# EAGLE board mega pinout (4) (EAGLE 9.3.0)
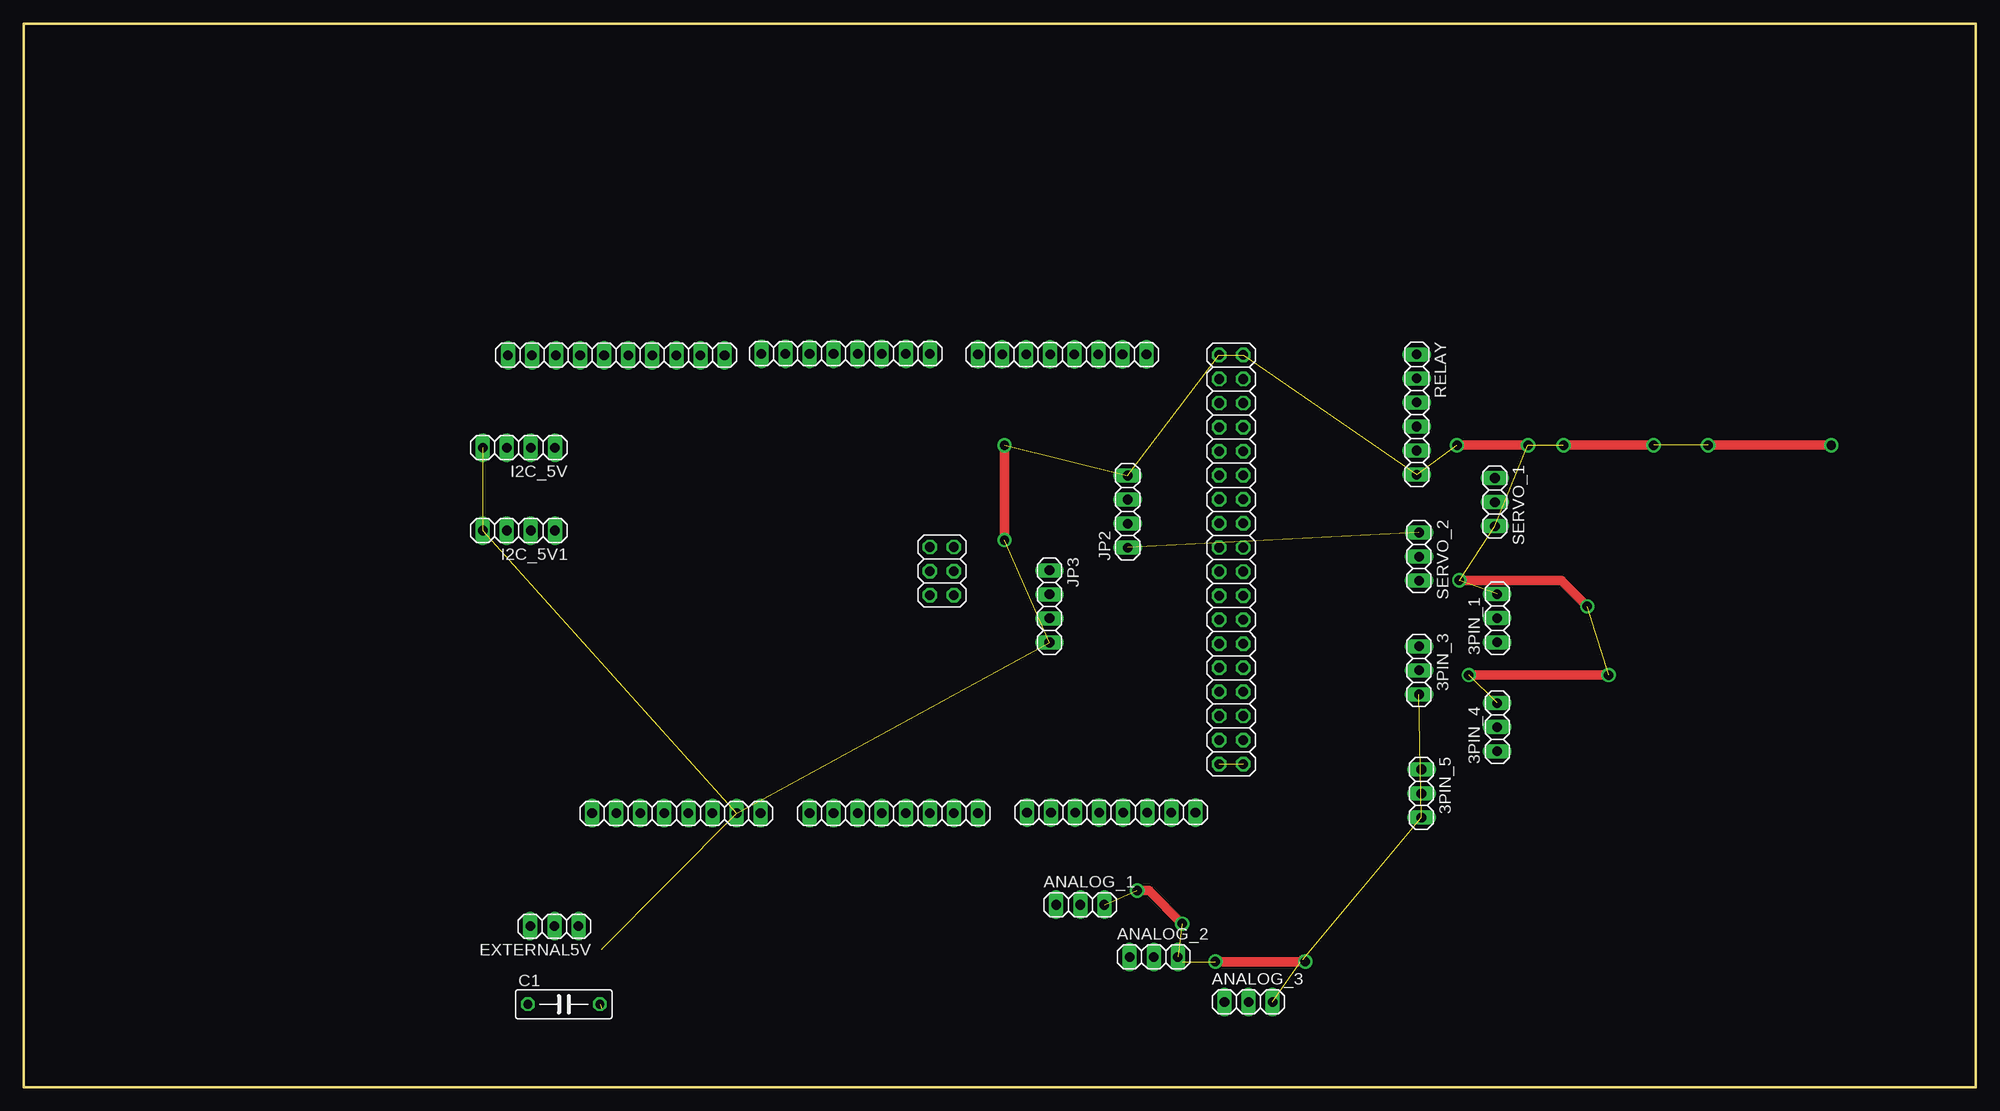
[diagram p0: board, top side]
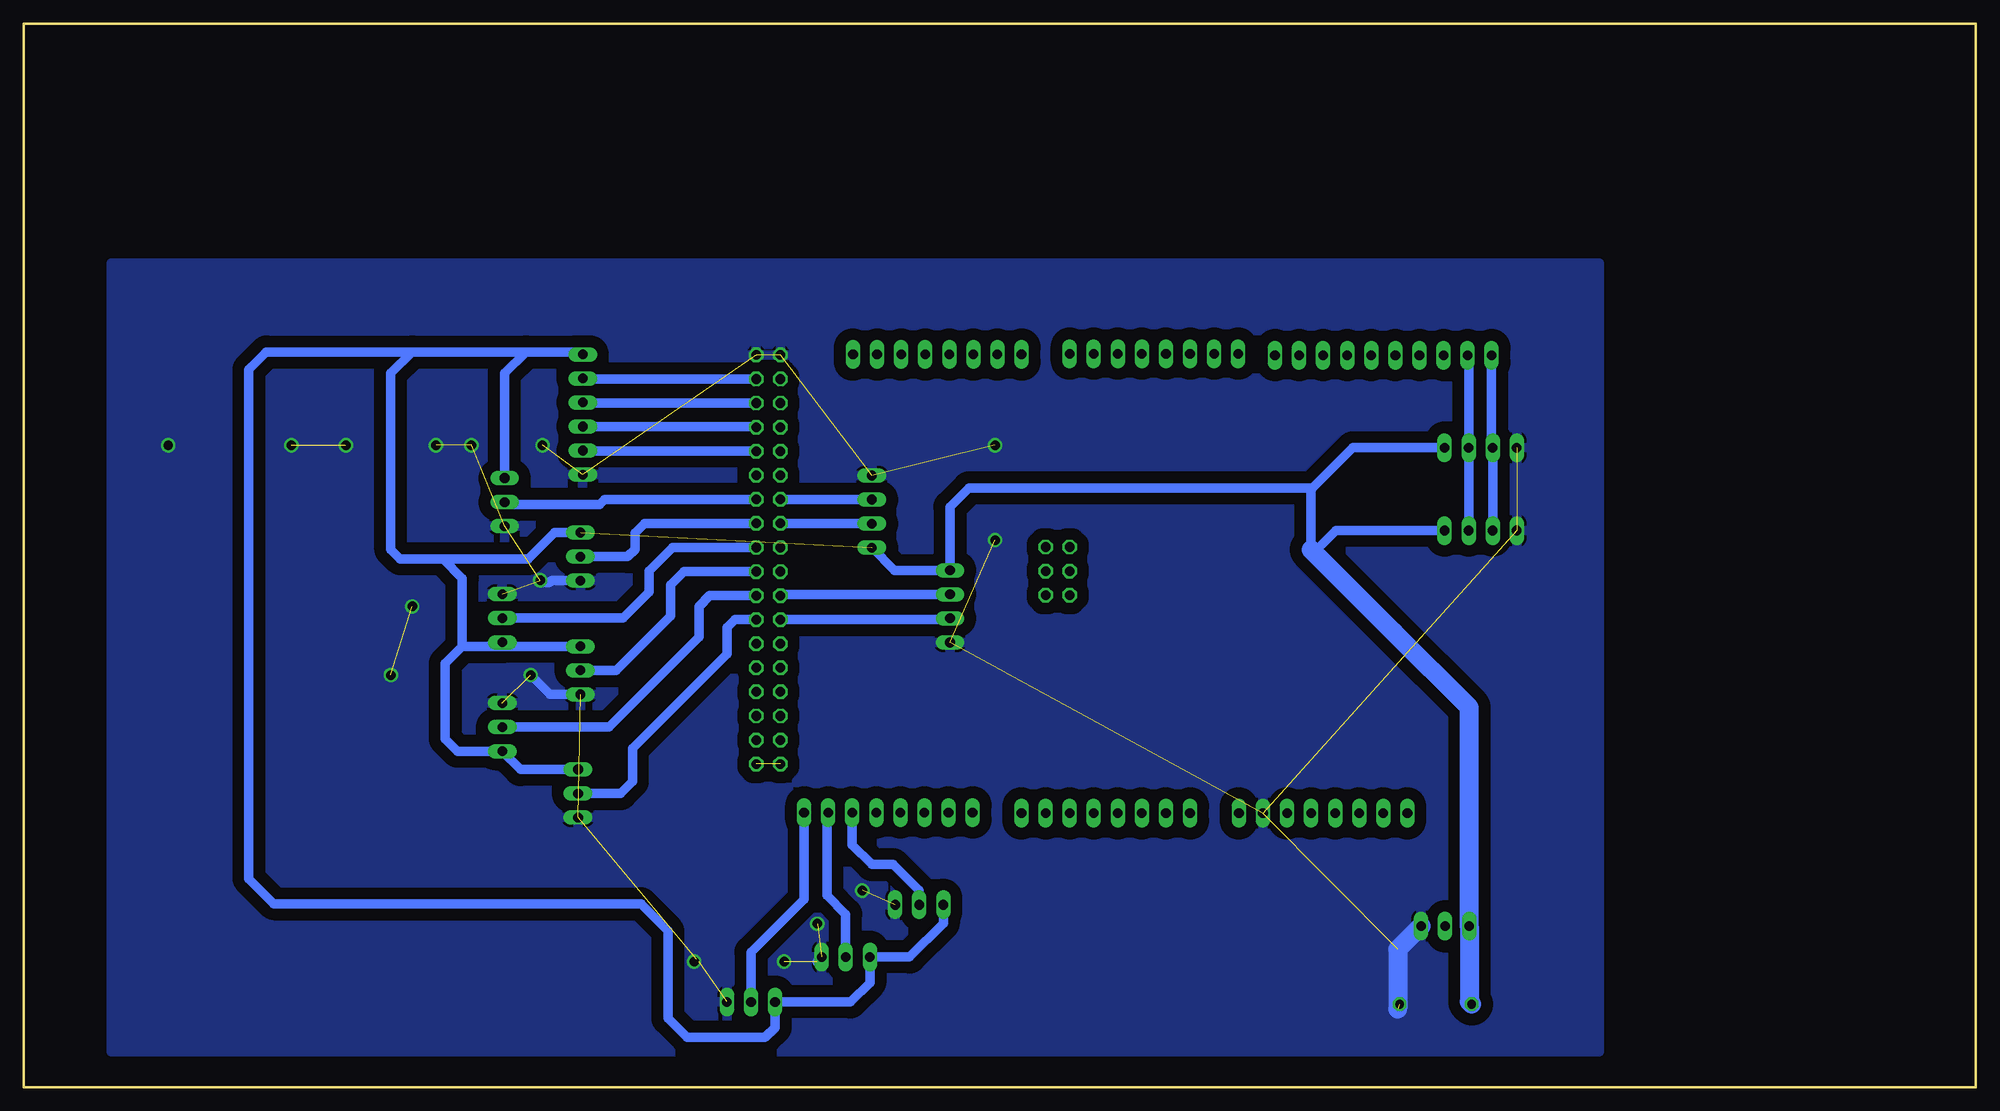
[diagram p1: board, bottom side, seen from below]

Size 206 x 112.25 mm. Coordinates in mm from the lower left corner, seen from the top.
Outline: 0,0 206,0 206,112.25 0,112.25 0,0
Copper layers (1*16): Top 0.035mm / dielectric 1.5mm / Bottom 0.035mm
Design rules "default": minimum track width 10mil, minimum drill 24mil, track to track 8mil, track to pad 8mil, pad to pad 8mil, via to via 8mil, smd to smd 8mil, copper to edge 40mil, drill to drill 8mil, minimum pad ring 10mil, minimum via ring 8mil, stop-mask expansion 4mil, vias tented up to drill 0mil, thermal gap 10mil
Net classes: 1 vcc: width 0.305 mm

## Footprints (pad centres in the part's own frame; a part is rotated, then mirrored left to right if it is on the bottom)
1X03 = drill 1.016 long: 1 -2.54,0; 2 0,0; 3 2.54,0
C075-032X103 = drill 0.914 octagon: 1 -3.81,0; 2 3.81,0
1X04 = drill 1.016 long: 1 -3.81,0; 2 -1.27,0; 3 1.27,0; 4 3.81,0
2X18 = drill 1.016 octagon: 1 -21.59,-1.27; 2 -21.59,1.27; 3 -19.05,-1.27; 4 -19.05,1.27; 5 -16.51,-1.27; 6 -16.51,1.27; 7 -13.97,-1.27; 8 -13.97,1.27; 9 -11.43,-1.27; 10 -11.43,1.27; 11 -8.89,-1.27; 12 -8.89,1.27; 13 -6.35,-1.27; 14 -6.35,1.27; 15 -3.81,-1.27; 16 -3.81,1.27; 17 -1.27,-1.27; 18 -1.27,1.27; 19 1.27,-1.27; 20 1.27,1.27; 21 3.81,-1.27; 22 3.81,1.27; 23 6.35,-1.27; 24 6.35,1.27; 25 8.89,-1.27; 26 8.89,1.27; 27 11.43,-1.27; 28 11.43,1.27; 29 13.97,-1.27; 30 13.97,1.27; 31 16.51,-1.27; 32 16.51,1.27; 33 19.05,-1.27; 34 19.05,1.27; 35 21.59,-1.27; 36 21.59,1.27
1X10 = drill 1.016 long: 1 -11.43,0; 2 -8.89,0; 3 -6.35,0; 4 -3.81,0; 5 -1.27,0; 6 1.27,0; 7 3.81,0; 8 6.35,0; 9 8.89,0; 10 11.43,0
1X08 = drill 1.016 long: 1 -8.89,0; 2 -6.35,0; 3 -3.81,0; 4 -1.27,0; 5 1.27,0; 6 3.81,0; 7 6.35,0; 8 8.89,0
2X03 = drill 1.016 octagon: 1 -2.54,-1.27; 2 -2.54,1.27; 3 0,-1.27; 4 0,1.27; 5 2.54,-1.27; 6 2.54,1.27
1X06 = drill 1.016 long: 1 -6.35,0; 2 -3.81,0; 3 -1.27,0; 4 1.27,0; 5 3.81,0; 6 6.35,0

## Placement (x,y rotation side)
3PIN_1  [1X03]  155.5,49.5 90 top
3PIN_3  [1X03]  147.25,44 270 top
3PIN_4  [1X03]  155.5,38 90 top
3PIN_5  [1X03]  147.5,31 270 top
ANALOG_1  [1X03]  111.5,19.25 0 top
ANALOG_2  [1X03]  119.25,13.75 0 top
ANALOG_3  [1X03]  129.25,9 0 top
C1  [C075-032X103]  57,8.75 0 top
EXTERNAL5V  [1X03]  56,17 180 top
I2C_5V  [1X04]  52.25,67.5 180 top
I2C_5V1  [1X04]  52.25,58.75 180 top
JP1  [2X18]  127.42,55.69 270 top
JP2  [1X04]  116.5,60.75 90 top
JP3  [1X04]  108.25,50.75 270 top
JP13  [1X10]  62.52,77.25 0 top
JP14  [1X08]  86.74,77.42 0 top
JP15  [1X08]  109.59,77.33 0 top
JP16  [1X08]  68.87,28.91 0 top
JP17  [1X08]  91.82,28.91 0 top
JP18  [1X08]  114.76,28.99 0 top
JP19  [2X03]  96.9,54.48 90 top
RELAY  [1X06]  147,71 270 top
SERVO_1  [1X03]  155.25,61.75 270 top
SERVO_2  [1X03]  147.25,56 270 top

## Library data of the parts
3PIN_1 3PIN_3-3PIN_5 ANALOG_1-ANALOG_3 EXTERNAL5V I2C_5V I2C_5V1 JP1-JP3 JP13-JP19 RELAY SERVO_1 SERVO_2 = pinhead
C1 = resistor

## Nets
2: JP14.6
3: JP14.5
3V3: JP16.4
4: JP14.4
5: JP14.3
5V: 3PIN_1.1 3PIN_3.1 3PIN_4.1 3PIN_5.1 ANALOG_1.1 ANALOG_2.1 ANALOG_3.1 C1.1 EXTERNAL5V.3 I2C_5V1.1 I2C_5V.1 JP2.1 JP3.1 RELAY.1 SERVO_1.1 SERVO_2.1
5V_2: JP19.2
6: JP14.2
7: JP14.1
8: JP13.10
9: JP13.9
10: JP13.8
11: JP13.7
12: JP13.6
13: JP13.5
23: JP1.4 RELAY.2
24: JP1.5
25: JP1.6 RELAY.3
26: JP1.7
27: JP1.8 RELAY.4
28: JP1.9
29: JP1.10 RELAY.5
30: JP1.11
31: JP1.14 SERVO_1.2
35: JP1.16 SERVO_2.2
37: 3PIN_1.2 JP1.18
38: JP1.19
39: 3PIN_3.2 JP1.20
40: JP1.21 JP3.2
41: 3PIN_4.2 JP1.22
42: JP1.23 JP3.3
43: 3PIN_5.2 JP1.24
44: JP1.25
45: JP1.26
46: JP1.27
47: JP1.28
48: JP1.29
49: JP1.30
50: JP1.31
51: JP1.32
52: JP1.33
53: JP1.34
A0: JP17.1
A1: JP17.2
A2: JP17.3
A3: JP17.4
A4: JP17.5
A5: JP17.6
A6: JP17.7
A7: JP17.8
A8: JP18.1
A9: JP18.2
A10: JP18.3
A11: JP18.4
A12: JP18.5
A13: ANALOG_1.2 JP18.6
A14: ANALOG_2.2 JP18.7
A15: ANALOG_3.2 JP18.8
AREF: JP13.3
CLK: JP19.3
GND: 3PIN_1.3 3PIN_3.3 3PIN_4.3 3PIN_5.3 ANALOG_1.3 ANALOG_2.3 ANALOG_3.3 C1.2 EXTERNAL5V.1 I2C_5V1.4 I2C_5V.4 JP1.1 JP1.2 JP2.4 JP3.4 JP16.7 RELAY.6 SERVO_1.3 SERVO_2.3
GND_2: JP19.6
INT2: JP15.6
INT3: JP15.5
IOREF: JP16.2
MISO: JP19.1
MOSI: JP19.4
N$1: JP1.3
N$2: JP1.15 JP2.2
N$3: JP1.13 JP2.3
N$4: JP1.35 JP1.36
RESET: JP16.3
RESET_2: JP19.5
RX0: JP14.8
RX2: JP15.4
RX3: JP15.2
SCL: I2C_5V1.3 I2C_5V.3 JP13.1
SCL2: JP15.7
SDA: I2C_5V1.2 I2C_5V.2 JP13.2
SDA2: JP15.8
TX0: JP14.7
TX2: JP15.3
TX3: JP15.1
VIN: JP16.8

## Tracks (layer width: path | path; a pad name or v marks a point on that pad's centre or on a via)
5V  (1 unrouted)
  Bottom 1.016: ANALOG_1.1 108.96,17.29 112.5,13.75 ANALOG_2.1 116.71,11.04 118.75,9 ANALOG_3.1 126.71,6.29 127.75,5.25 136,5.25 138,7.25 138,16.5 140.85,19.36 179.6,19.36 182.25,22 182.25,75.75 180.4,77.6 165,77.6 | 165,77.6 153,77.6 | 153,77.6 147.25,77.6 RELAY.1 | SERVO_2.1 149.96,58.54 152.75,55.75 161.75,55.75 | 161.75,55.75 166.25,55.75 167.25,56.75 167.25,75.35 165,77.6 | SERVO_1.1 155.25,75.35 153,77.6 | 3PIN_5.1 153.58,33.54 3PIN_4.1 160.21,35.46 161.5,36.75 161.5,44.75 159.71,46.54 | 3PIN_3.1 155.08,46.54 | 155.08,46.54 3PIN_1.1 | 159.71,46.54 155.08,46.54 | 159.71,46.54 159.71,53.71 161.75,55.75 | 70,63.25 70.14,63.11 70.14,56.75 70.14,56.11 67.5,58.75 I2C_5V1.1 | 70,63.25 65.75,67.5 I2C_5V.1 | JP2.1 114.12,54.56 JP3.1 108.25,61.25 106.25,63.25 70,63.25
  Bottom 2: 70.14,56.75 61.45,48.05 53.46,40.07 EXTERNAL5V.3 53.46,9.02 C1.1
23
  Bottom 1.016: JP1.4 146.94,74.75 RELAY.2
25
  Bottom 1.016: JP1.6 146.94,72.2 RELAY.3
27
  Bottom 1.016: RELAY.4 128.76,69.73 JP1.8
29
  Bottom 1.016: JP1.10 146.94,67.12 RELAY.5
31
  Bottom 1.016: JP1.14 144.71,62.05 145.25,61.5 155,61.5 SERVO_1.2
35
  Bottom 1.016: JP1.16 140.5,59.51 141.5,58.5 141.5,56.75 142.25,56 SERVO_2.2
37
  Bottom 1.016: JP1.18 137.53,56.97 140,54.5 140,52.25 142.75,49.5 3PIN_1.2
39
  Bottom 1.016: 3PIN_3.2 143.5,44 137.75,49.75 137.75,53 136.32,54.42 JP1.20
40
  Bottom 1.016: JP3.2 126.02,52.02 JP1.21
41
  Bottom 1.016: JP1.22 133.62,51.88 134.75,50.75 134.75,47.5 144.25,38 3PIN_4.2
42
  Bottom 1.016: JP1.23 108.39,49.34 JP3.3
43
  Bottom 1.016: JP1.24 130.91,49.34 131.75,48.5 131.75,45.75 141.75,35.75 141.75,32.25 143,31 3PIN_5.2
A13
  Bottom 1.016: JP18.6 118.57,25.57 116.5,23.5 114.25,23.5 111.5,20.75 ANALOG_1.2
A14
  Bottom 1.016: ANALOG_2.2 119.25,18.25 121.25,20.25 121.25,28.85 JP18.7
A15
  Bottom 1.016: JP18.8 123.65,19.85 129.25,14.25 ANALOG_3.2
GND  (via drill 1 pad 1.3)  (24 unrouted)
  Top 1.016: v177.75,67.75 v190.75,67.75 | v158.75,67.75 v151.25,67.75 | v122.25,17.25 118.75,20.75 v117.5,20.75 | v125.75,13.25 134.75,13.25 135,13.5 v135.25,13.25 | v162.5,67.75 v172,67.75 | v151.5,53.5 162.25,53.5 v165,50.75 | v152.5,43.5 v167.25,43.5 | v103.5,57.75 v103.5,67.75
  Bottom 1.016: ANALOG_2.3 122.29,13.25 | SERVO_2.3 150.29,53.46 150.5,53.25 151.25,53.25 v151.5,53.5 | 3PIN_3.3 150.46,41.46 v152.5,43.5
  Bottom 2: EXTERNAL5V.1 61,14.54 61,8.25
  pour Bottom (isolate 1.23): 39.75,87 39.75,3.75 196.75,3.75 196.75,87
N$2
  Bottom 1.016: JP1.15 116.53,59.51 JP2.2
N$3
  Bottom 1.016: JP2.3 126.13,62.02 JP1.13
N$4  (1 unrouted)
SCL
  Bottom 1.016: JP13.1 51.09,67.61 I2C_5V.3 I2C_5V1.3
SDA
  Bottom 1.016: JP13.2 53.52,77.14 I2C_5V.2 I2C_5V1.2